# Altium PCB Com_Board_2018.PcbDoc
Units mm, origin at the board's own origin, x right, y up, seen from the top; angles counter-clockwise.
Board outline 97.2 x 100.86 mm, 2 copper layers (Top Layer, Bottom Layer), stack 1.57 mm thick; 18 components, 16 nets, 138 pads, 0 vias.
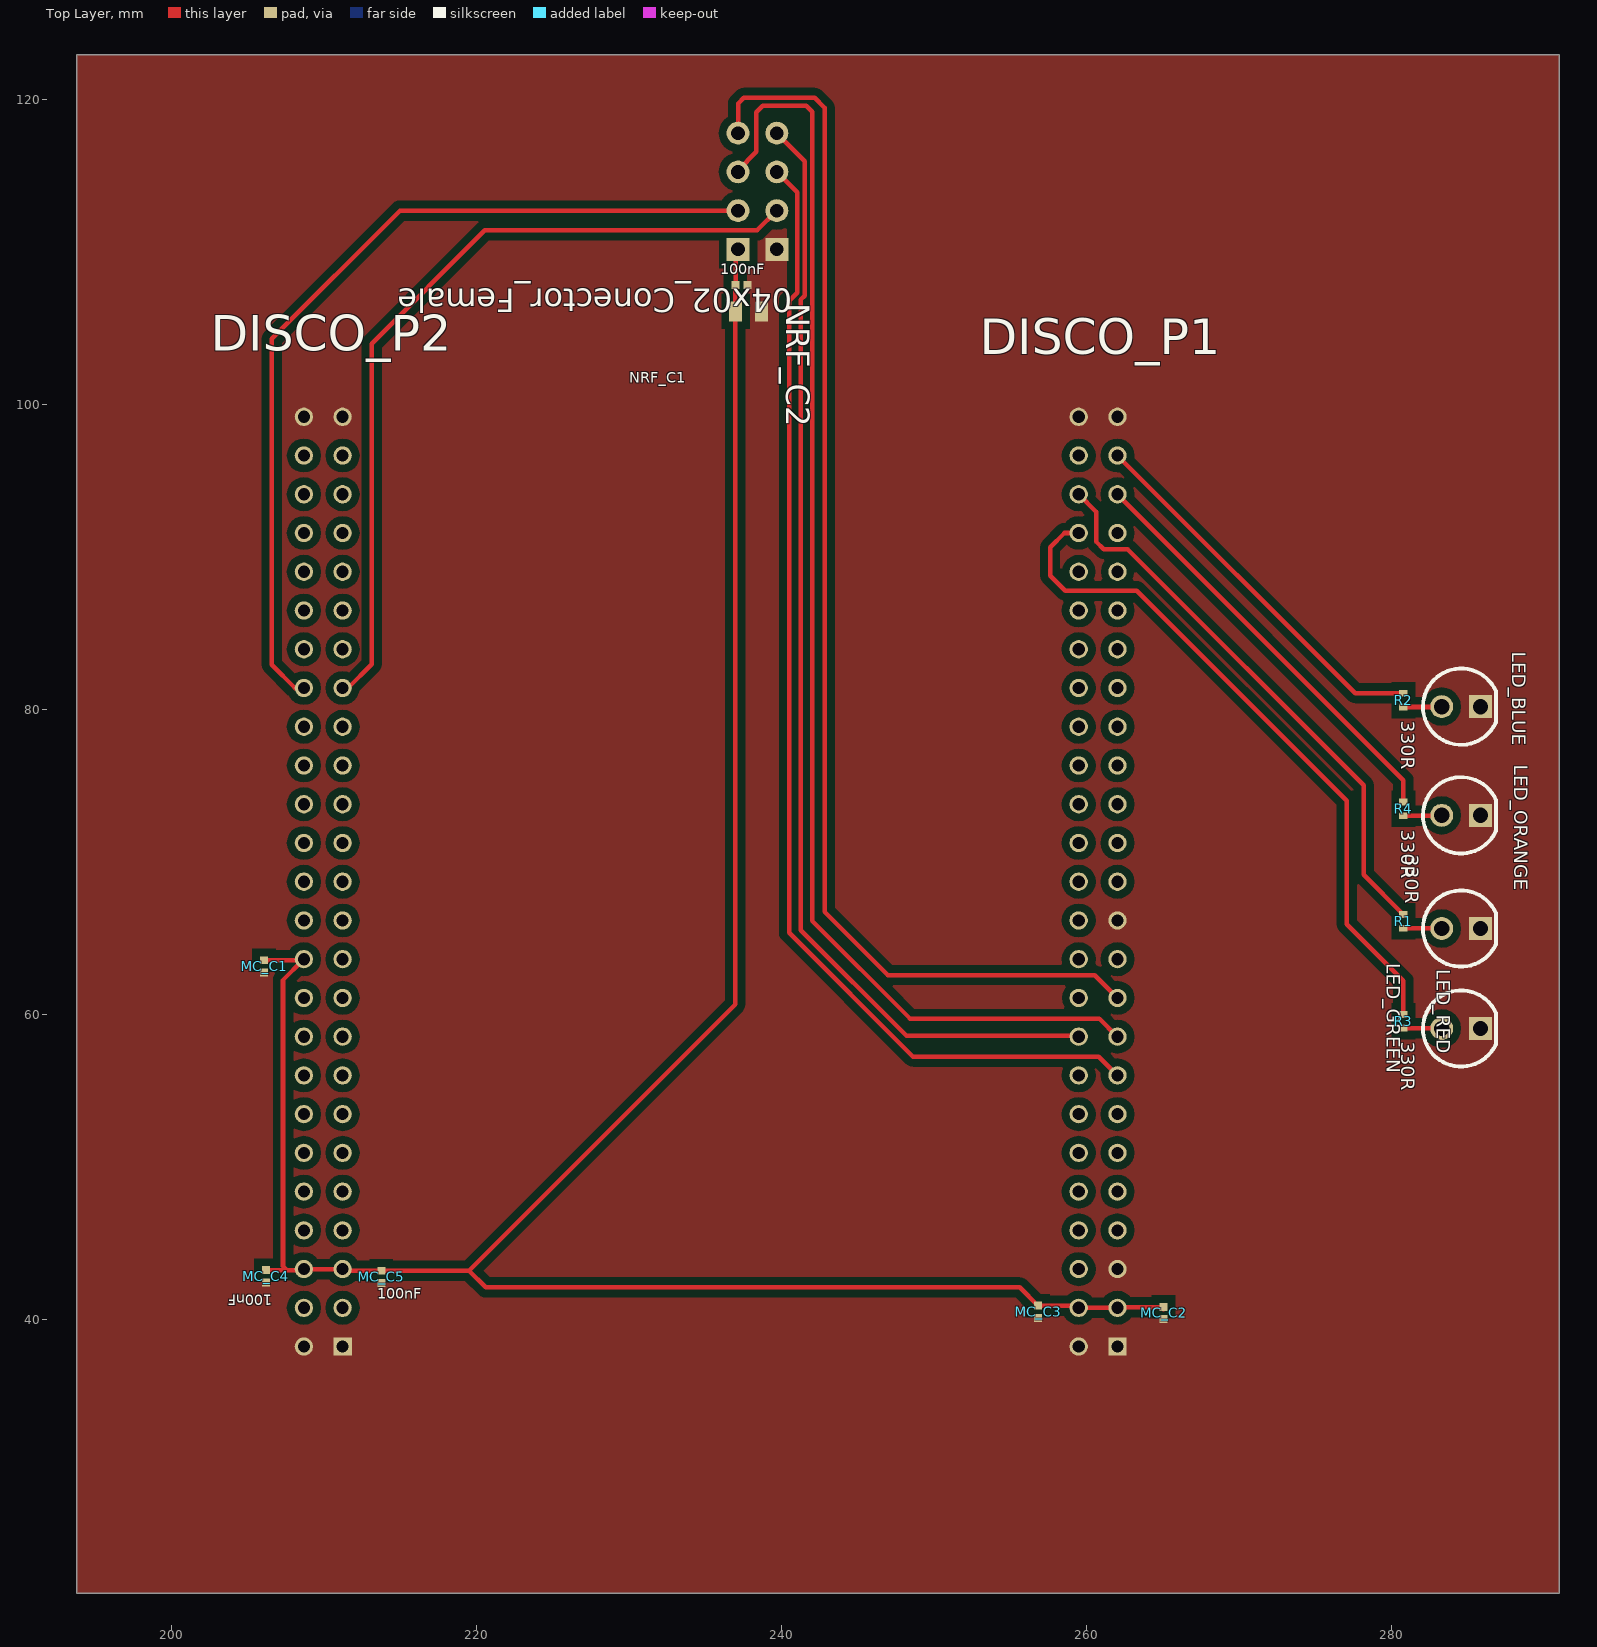
[diagram p0: Top Layer view]
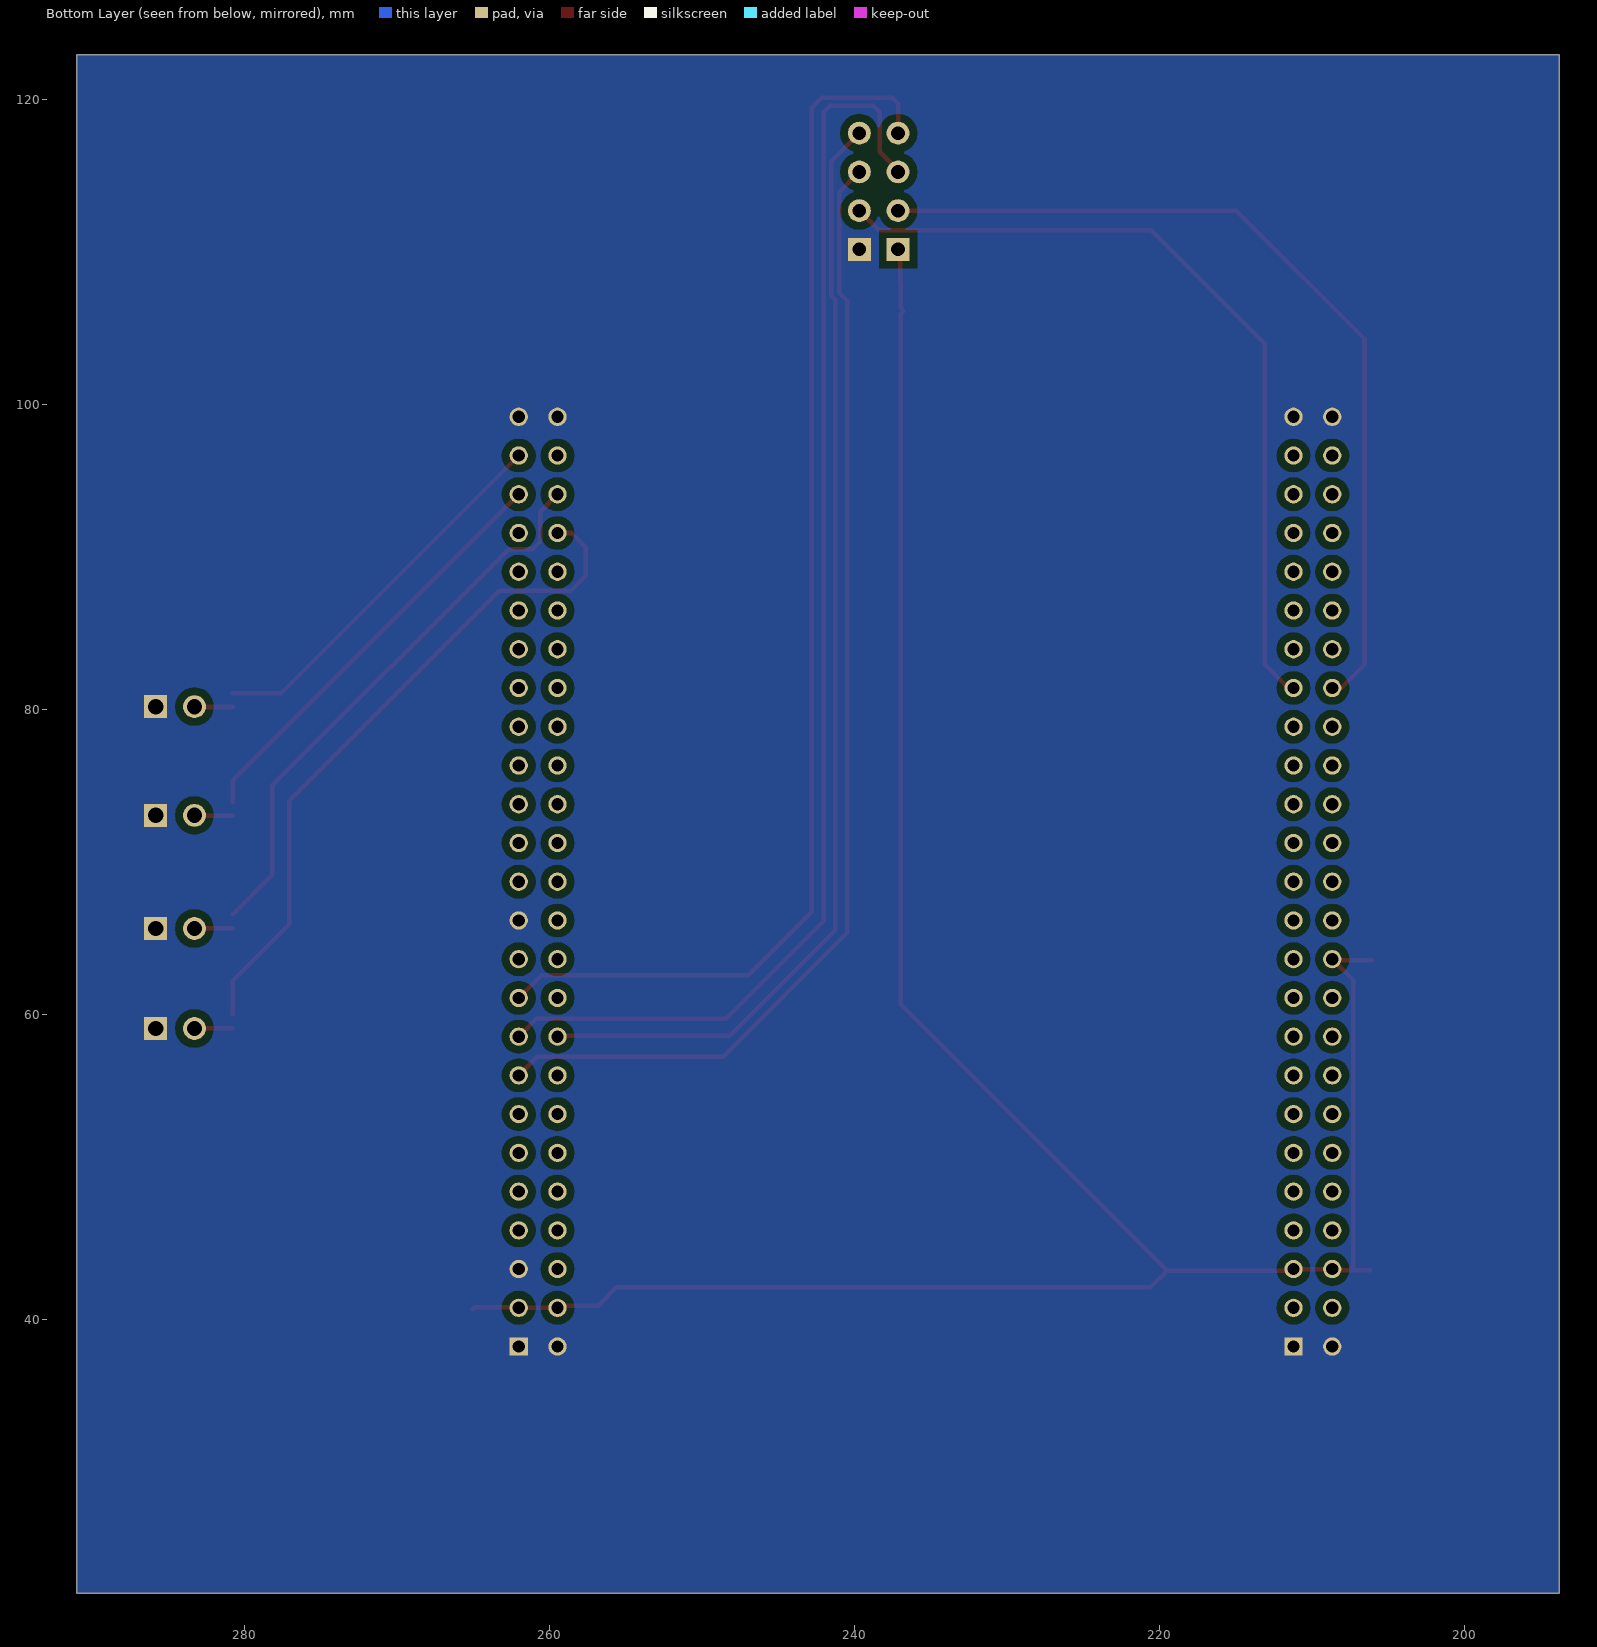
[diagram p1: Bottom Layer view, seen from below]

## Layer stack, top to bottom
Top Solder: solder mask 0.01, Solder Resist, Dk 3.5
Top Layer: signal copper 0.035
Dielectric 1: dielectric 1.5, FR-4, Dk 4.8
Bottom Layer: signal copper 0.035
Bottom Solder: solder mask 0.01, Solder Resist, Dk 3.5

## Board outline
193.775,122.937 193.775,22.075 290.975,22.075 290.975,122.937

## Design rules (kind name [scope] priority, off if disabled: settings)
Clearance Clearance_1 [All] p1: gap=0.3 ignorepadtopadclearanceinfootprint=FALSE except(0: Arc-Hole Track-Hole SMDPad-Hole THPad-Hole Via-Hole Fill-Hole Poly-Hole Region-Hole Text-Hole; 0.15: SMDPad-SMDPad; 0.2: Track-Track Track-SMDPad; 0.5: Arc-Poly Track-Poly SMDPad-Poly THPad-Poly Via-Poly Fill-Poly Poly-Poly Poly-Region Poly-Text)
HoleSize [All] p1: absolutevalues=TRUE maxlimit=10 minlimit=0.025 maxpercent=80.000 minpercent=20.000
MinimumSolderMaskSliver [All] p1 off: minsoldermaskwidth=0.2
PlaneConnect [All] p1: planeconnectstyle=Direct reliefexpansion=0.508 reliefentries=4 reliefconductorwidth=0.254 reliefairgap=0.254
PolygonConnect PolygonConnect_3 [InNet('GND')] p1: connectstyle=Direct reliefconductorwidth=0.254 reliefentries=4 polygonreliefangle="90 Angle" airgapwidth=0.254
PolygonConnect PolygonConnect_1 [InNetClass('DIRECT')] p2: connectstyle=Direct reliefconductorwidth=0.508 reliefentries=4 polygonreliefangle="90 Angle" airgapwidth=0.254
PolygonConnect PolygonConnect_2 [IsVia] p3: connectstyle=Direct reliefconductorwidth=0.254 reliefentries=4 polygonreliefangle="90 Angle" airgapwidth=0.254
PolygonConnect [All] p4: connectstyle=Direct reliefconductorwidth=0.3 reliefentries=4 polygonreliefangle="90 Angle" airgapwidth=0.254
RoutingVias [All] p1: holewidth=0.7 width=1 viastyle="Through Hole" minholewidth=0.5 minwidth=0.7 maxholewidth=6 maxwidth=6
SilkToSilkClearance [All] p1 off: silktosilkclearance=0.254
SilkToSolderMaskClearance [IsPad] p1 off: minsilkscreentomaskgap=0.254 clearancetoexposedcopper=TRUE
SolderMaskExpansion [All] p1: expansion=0.102
Width [All] p1: maxlimit=1.016 minlimit=0.2 preferedwidth=0.3
25 further rules are at their usual default settings.

## Components (designator, comment, footprint, x,y, rotation, side; value= is the part's Value field where it differs from the comment)
04x02_Conector_Female "PPPC042LFBN-RC" 04x02_Conector_Female 238.4,113.992 r270 top
DISCO_P1 "SFH11-PBPC-D25-ST-BK" 25x02_Conector_Female#1 260.732,68.724 r90 top locked
DISCO_P2 "SFH11-PBPC-D25-ST-BK" 25x02_Conector_Female#2 209.932,68.724 r90 top locked
LED_BLUE "LED" LED-5MM-PCB 284.535,80.2 r0 top
LED_GREEN "LED" LED-5MM-PCB 284.535,59.1 r0 top
LED_ORANGE "LED" LED-5MM-PCB 284.535,73.075 r0 top
LED_RED "LED" LED-5MM-PCB 284.535,65.65 r0 top
MC_C1 "100nF" 0402-CAP 206.05,63.175 r90 top value=100n
MC_C2 "100nF" 0402-CAP 265.025,40.45 r90 top value=100n
MC_C3 "100nF" 0402-CAP 256.795,40.53 r270 top value=100n
MC_C4 "100nF" 0402-CAP 206.175,42.85 r90 top value=100n
MC_C5 "100nF" 0402-CAP 213.742,42.816 r90 top value=100n
NRF_C1 "100nF" 0402-CAP 237.35,107.85 r0 top value=100n
NRF_C2 "10uF" 0805-CAP 237.825,106.117 r0 top
R1 "330R" 0402-RES-HD 280.75,66.125 r270 top value=330
R2 "330R" 0402-RES-HD 280.75,80.625 r270 top value=330
R3 "330R" 0402-RES-HD 280.75,59.575 r270 top value=330
R4 "330R" 0402-RES-HD 280.75,73.5 r270 top value=330

## Footprints (in the part's own frame and the unit in brackets; to place one, negate y for a bottom-side part, rotate by r counter-clockwise, add the part's x,y. Pads: shape width x height; smd on the part's side, far side on the other; paste and mask are expansions set on the pad)
04x02_Conector_Female [mm] "PPPC042LFBN-RC"
  round 1.5 hole 0.9: 0(-3.81,1.27) 1(-1.27,1.27) 2(1.27,1.27) 4(-3.81,-1.27) 5(-1.27,-1.27) 6(1.27,-1.27)
  rect 1.5x1.5 hole 0.9: 3(3.81,1.27) 7(3.81,-1.27)
  body extent -5.3,-2.55 5.36,2.53, height 8.52
25x02_Conector_Female#1 [mil] "SFH11-PBPC-D25-ST-BK"
  rect 47.25x47.25 hole 31.5: 1(-1200,-50)
  round 47.25 hole 31.5: 2(-1200,50) 3(-1100,-50) 4(-1100,50) 5(-1000,-50) 6(-1000,50) 7(-900,-50) 8(-900,50) 9(-800,-50) 10(-800,50) 11(-700,-50) 12(-700,50) 13(-600,-50) 14(-600,50) 15(-500,-50) 16(-500,50) 17(-400,-50) 18(-400,50) 19(-300,-50) 20(-300,50) 21(-200,-50) 22(-200,50) 23(-100,-50) 24(-100,50) 26(0,50) 27(100,-50) 28(100,50) 29(200,-50) 30(200,50) 31(300,-50) 32(300,50) 33(400,-50) 34(400,50) 35(500,-50) 36(500,50) 37(600,-50) 38(600,50) 39(700,-50) 40(700,50) 41(800,-50) 42(800,50) 43(900,-50) 44(900,50) 45(1000,-50) 46(1000,50) 47(1100,-50) 48(1100,50) 49(1200,-50) 50(1200,50)
  oval 47.25x47.24 hole 31.5: 25(0,-50)
  body extent -1350,-121 1350,115, height 333
25x02_Conector_Female#2 [mil] "SFH11-PBPC-D25-ST-BK"
  rect 47.25x47.25 hole 31.5: 1(-1200,-50)
  round 47.25 hole 31.5: 2(-1200,50) 3(-1100,-50) 4(-1100,50) 5(-1000,-50) 6(-1000,50) 7(-900,-50) 8(-900,50) 9(-800,-50) 10(-800,50) 11(-700,-50) 12(-700,50) 13(-600,-50) 14(-600,50) 15(-500,-50) 16(-500,50) 17(-400,-50) 18(-400,50) 19(-300,-50) 20(-300,50) 21(-200,-50) 22(-200,50) 23(-100,-50) 24(-100,50) 25(0,-50) 26(0,50) 27(100,-50) 28(100,50) 29(200,-50) 30(200,50) 31(300,-50) 32(300,50) 33(400,-50) 34(400,50) 35(500,-50) 36(500,50) 37(600,-50) 38(600,50) 39(700,-50) 40(700,50) 41(800,-50) 42(800,50) 43(900,-50) 44(900,50) 45(1000,-50) 46(1000,50) 47(1100,-50) 48(1100,50) 49(1200,-50) 50(1200,50)
  body extent -1350,-121 1350,115, height 333
0402-CAP [mm] "Chip Capacitor, Body 1.0x0.5mm, Height 0.6mm, IPC Medium Density"
  rect 0.52x0.52 smd: 1(-0.4,0) 2(0.4,0)
  body extent -0.55,-0.3 0.55,0.3, height 0.33
0402-RES-HD [mm] "Chip Resistor, Body 1.0x0.5mm, IPC High Density"
  rect 0.45x0.55 smd: 1(-0.45,0) 2(0.45,0)
  body extent -0.52,-0.27 0.53,0.28, height 0.4
0805-CAP [mm] "Chip Resistor, Body 2.0x1.3mm, IPC High Density"
  rect 0.85x1.3 smd: 1(-0.85,0) 2(0.85,0)
  body extent -1.1,-0.67 1.1,0.68, height 0.7
LED-5MM-PCB [mm]
  rect 1.5x1.5 hole 1: 1(1.27,0)
  round 1.5 hole 1: 2(-1.27,0)
  silkscreen extent -2.5,-2.5 2.28,2.5, body extent -2.98,-3.01 2.44,3.01, height 8.59

## Part data
04x02_Conector_Female: library part 04x02_Conector_Female, "8 Position Header Connector 0.100\" (2.54mm) Through Hole Gold"
DISCO_P1 DISCO_P2: library part 25x02_Conector_Female, "50 Position Header Connector 0.100\" (2.54mm) Through Hole Gold"
LED_BLUE LED_GREEN LED_ORANGE LED_RED: library part LED-5MM-3, "LED 5MM PTH"
MC_C1 MC_C2 MC_C3 MC_C4 MC_C5 NRF_C1: library part CC0402-100nF-A.12, "CAP CER 0.1UF 10V 20% X5R 0402", Part No=VJ0402V104ZXQPBC, Cod EMS=05.281.006.133
NRF_C2: library part CC0806-10uF-25V-1, "CAP CER 10UF 25V X5R 0805", Part No=GRM21BR61E106KA73L, Cod EMS=05.281.019.590
R1 R2 R3 R4: library part R0402-330R-7, "RES 330 OHM 1/10W 1% 0402 SMD", Part No=ERJ-2RKF3300X, Cod EMS=05.280.029.506, Family=ERJ-2RKF....X, Family Description="RESISTOR FILME ESPESSO 10R-1M / 1/10W / 1% / 0402. P/N: ERJ-2RKF....X – PANASONIC ELECTRONIC COMPONENTS."

## Nets (pads, with @x,y where several pads share a name; then routed paths per layer and width w, separated by ;. In a path a pad name is that pad's centre, name@x,y a point inside that pad or via, vN(x,y) a via of type N, cw(c..) or ccw(c..) an arc to the next point about the centre after c; other vN are vias at no path point)
GND: 04x02_Conector_Female.3 DISCO_P1.1 DISCO_P1.2 DISCO_P1.5 DISCO_P1.23 DISCO_P1.49 DISCO_P1.50 DISCO_P2.1 DISCO_P2.2 DISCO_P2.49 DISCO_P2.50 LED_BLUE.1 LED_GREEN.1 LED_ORANGE.1 LED_RED.1 MC_C1.1 MC_C2.1 MC_C3.2 MC_C4.1 MC_C5.1 NRF_C1.2 NRF_C2.2
LED_B: DISCO_P1.47 R2.1 | length 25.2
  Top Layer w0.3: DISCO_P1.47 277.591,81.075 R2.1
LED_G: DISCO_P1.44 R3.1 | length 45.3
  Top Layer w0.3: DISCO_P1.44 258.534,91.584 257.6,90.65 257.6,88.775 258.575,87.8 263.275,87.8 277.05,74.025 277.05,65.925 280.75,62.225 R3.1 ; R3.1@280.779,60.025 R3.1@280.779,60.125
LED_O: DISCO_P1.45 R4.1 | length 27.9
  Top Layer w0.3: DISCO_P1.45 280.75,75.376 R4.1
LED_R: DISCO_P1.46 R1.1 | length 37.3
  Top Layer w0.3: DISCO_P1.46 260.6,92.986 260.6,91.025 261.1,90.525 262.665,90.525 278.15,75.04 278.15,69.175 R1.1
NetLED_BLUE_2: LED_BLUE.2 R2.2 | length 2.4
  Top Layer w0.3: R2.2 LED_BLUE.2@283.165,80.175
NetLED_GREEN_2: LED_GREEN.2 R3.2 | length 2.3
  Top Layer w0.3: R3.2 LED_GREEN.2@283.015,59.125
NetLED_ORANGE_2: LED_ORANGE.2 R4.2 | length 2.5
  Top Layer w0.3: R4.2 LED_ORANGE.2@283.24,73.05
NetLED_RED_2: LED_RED.2 R1.2 | length 2.5
  Top Layer w0.3: R1.2 LED_RED.2@283.24,65.675
NRF_CE: 04x02_Conector_Female.2 DISCO_P2.35 | length 53.8
  Top Layer w0.3: DISCO_P2.35 211.553,81.424 213.1,82.97 213.1,104 220.525,111.425 238.373,111.425 04x02_Conector_Female.2
NRF_CS#: 04x02_Conector_Female.6 DISCO_P2.36 | length 58.2
  Top Layer w0.3: DISCO_P2.36 208.076,81.424 206.55,82.95 206.55,104.31 214.962,112.722 04x02_Conector_Female.6 04x02_Conector_Female.6@237.1,112.692
NRF_IRQ: 04x02_Conector_Female.4 DISCO_P1.19 | length 82.3
  Top Layer w0.3: 04x02_Conector_Female.4 237.13,119.745 237.51,120.125 242.145,120.125 242.8,119.47 242.8,66.75 246.957,62.593 260.512,62.593 DISCO_P1.19
SPI1_MISO: 04x02_Conector_Female.0 DISCO_P1.18 | length 74.2
  Top Layer w0.3: 04x02_Conector_Female.0 241.5,115.972 241.5,107.142 241.25,106.892 241.25,65.55 248.175,58.625 259.401,58.625 DISCO_P1.18
SPI1_MOSI: 04x02_Conector_Female.5 DISCO_P1.17 | length 84.6
  Top Layer w0.3: 04x02_Conector_Female.5 237.13,115.38 238.33,116.58 238.33,119.18 238.75,119.6 241.595,119.6 242,119.195 242,106.25 242,66.15 248.4,59.75 260.816,59.75 DISCO_P1.17
SPI1_SCK: 04x02_Conector_Female.1 DISCO_P1.15 | length 76.1
  Top Layer w0.3: 04x02_Conector_Female.1 241,113.932 241,107.349 240.475,106.824 240.475,101.615 240.475,65.375 248.6,57.25 260.776,57.25 DISCO_P1.15
VCC: 04x02_Conector_Female.7 DISCO_P1.3 DISCO_P1.4 DISCO_P2.5 DISCO_P2.6 DISCO_P2.22 MC_C1.2 MC_C2.2 MC_C3.1 MC_C4.2 MC_C5.2 NRF_C1.1 NRF_C2.1 | length 158.1
  Top Layer w0.3: MC_C1.2 DISCO_P2.22@208.593,63.575 ; MC_C4.2 207.55,43.25 ; DISCO_P2.22 DISCO_P2.22@208.593,63.575 ; NRF_C2.1@236.8,106.117 236.95,105.967 236.95,60.675 219.491,43.216 ; NRF_C2.1@236.875,106.292 236.95,106.367 236.95,107.992 236.975,108.017 236.975,110.027 04x02_Conector_Female.7 04x02_Conector_Female.7@237.362,109.95 ; MC_C2.2@265.025,40.7 264.9,40.825 262.043,40.825 DISCO_P1.3 DISCO_P1.4 259.316,40.93 MC_C3.1 255.6,42.125 220.581,42.125 219.491,43.216 ; 207.55,43.25 208.588,43.25 DISCO_P2.6 DISCO_P2.5 211.31,43.216 MC_C5.2 219.491,43.216 ; 207.55,43.25 207.293,43.507 207.293,62.275 DISCO_P2.22@208.593,63.575
pads on no net: DISCO_P1.6 DISCO_P1.7 DISCO_P1.8 DISCO_P1.9 DISCO_P1.10 DISCO_P1.11 DISCO_P1.12 DISCO_P1.13 DISCO_P1.14 DISCO_P1.16 DISCO_P1.20 DISCO_P1.21 DISCO_P1.22 DISCO_P1.24 DISCO_P1.25 DISCO_P1.26 DISCO_P1.27 DISCO_P1.28 DISCO_P1.29 DISCO_P1.30 DISCO_P1.31 DISCO_P1.32 DISCO_P1.33 DISCO_P1.34 DISCO_P1.35 DISCO_P1.36 DISCO_P1.37 DISCO_P1.38 DISCO_P1.39 DISCO_P1.40 DISCO_P1.41 DISCO_P1.42 DISCO_P1.43 DISCO_P1.48 DISCO_P2.3 DISCO_P2.4 DISCO_P2.7 DISCO_P2.8 DISCO_P2.9 DISCO_P2.10 DISCO_P2.11 DISCO_P2.12 DISCO_P2.13 DISCO_P2.14 DISCO_P2.15 DISCO_P2.16 DISCO_P2.17 DISCO_P2.18 DISCO_P2.19 DISCO_P2.20 DISCO_P2.21 DISCO_P2.23 DISCO_P2.24 DISCO_P2.25 DISCO_P2.26 DISCO_P2.27 DISCO_P2.28 DISCO_P2.29 DISCO_P2.30 DISCO_P2.31 DISCO_P2.32 DISCO_P2.33 DISCO_P2.34 DISCO_P2.37 DISCO_P2.38 DISCO_P2.39 DISCO_P2.40 DISCO_P2.41 DISCO_P2.42 DISCO_P2.43 DISCO_P2.44 DISCO_P2.45 DISCO_P2.46 DISCO_P2.47 DISCO_P2.48

## Polygon pours and split planes (outlines as drawn)
GND on Top Layer "Top Layer-No Net1" (solid, pour order 145): 193.775,122.937 193.775,22.075 290.975,22.075 290.975,122.937
no net on Top Layer "Top Layer-No Net 1" (solid, pour order 133): 320.1,155.1
GND on Bottom Layer "Top Layer-No Net2" (solid, pour order 146): 193.775,122.937 193.775,22.075 290.975,22.075 290.975,122.937

## Other copper
Top Layer:
  region: -133.25,79.25

## Silkscreen, mask and mechanical layers (free items; w line width, h text height)
Mechanical 1:
  lines w0.5: 290.975,122.22 290.975,22.075 ; 193.775,22.075 290.975,22.075 ; 193.775,22.075 193.775,122.937 ; 193.775,22.075 290.975,22.075 ; 193.775,22.075 193.775,122.937 ; 193.775,122.937 290.975,122.937 290.975,22.075